# EAGLE board Solo_MultiCharger (EAGLE 6.6.0), part 1 of 2
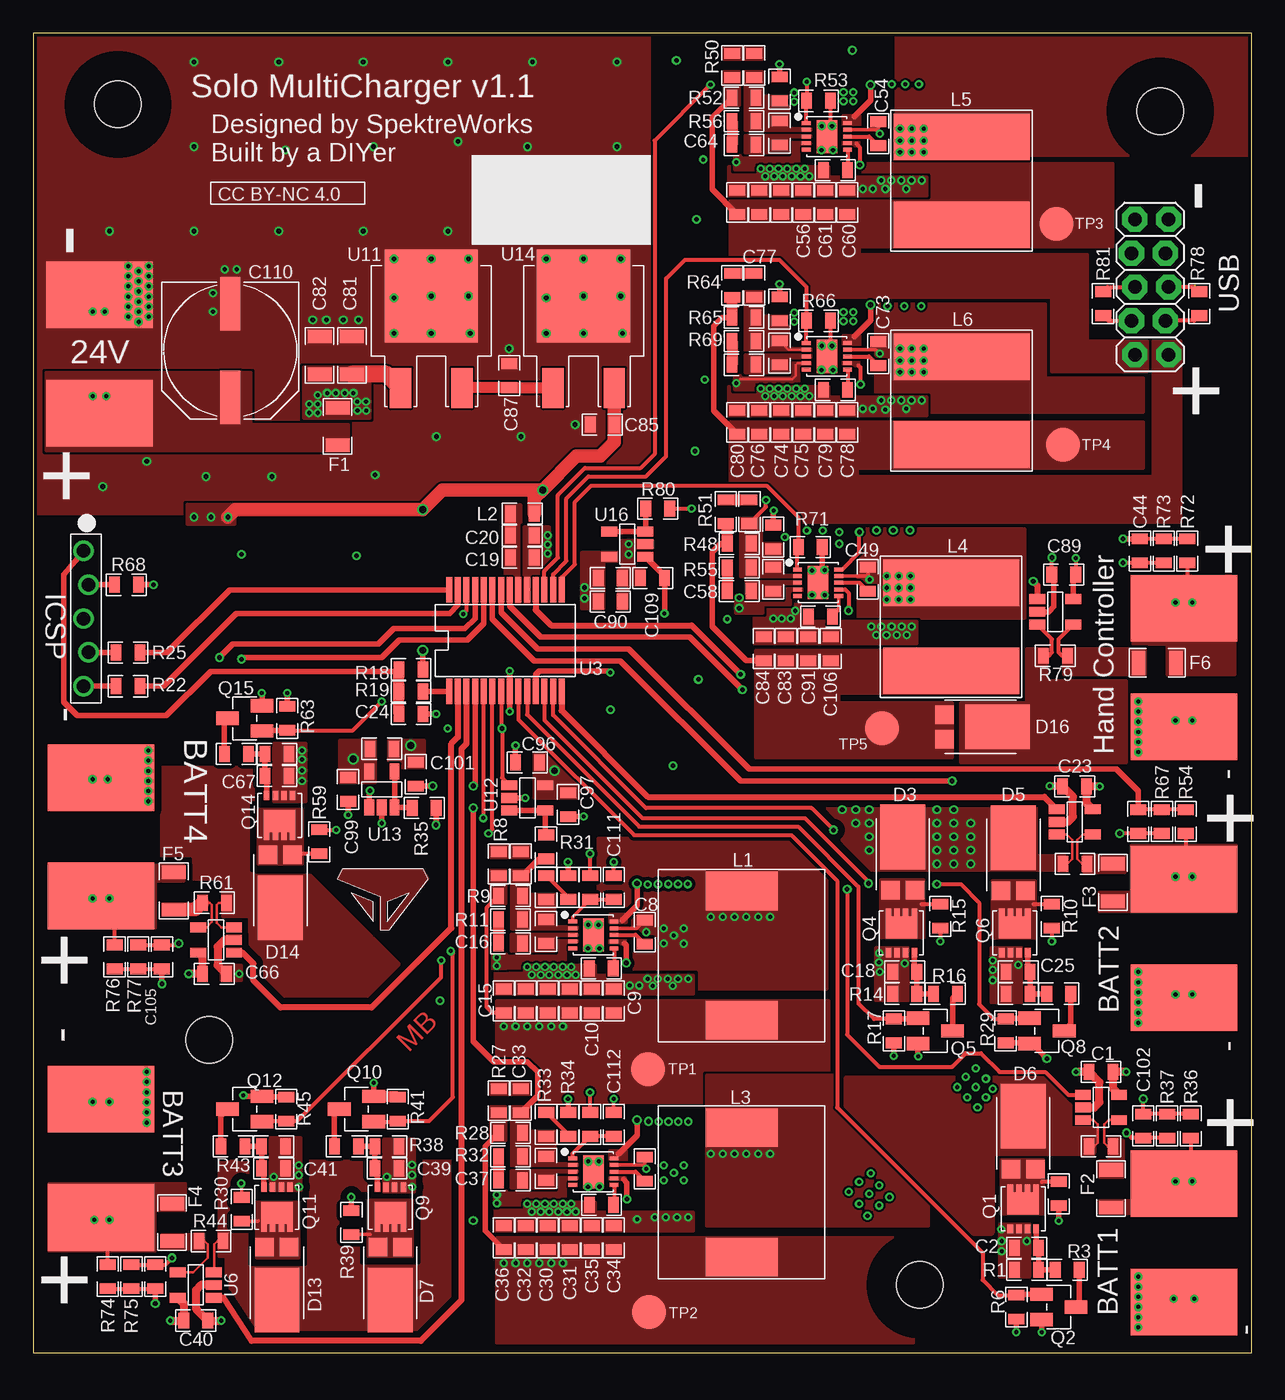
[diagram p0: board, top side]
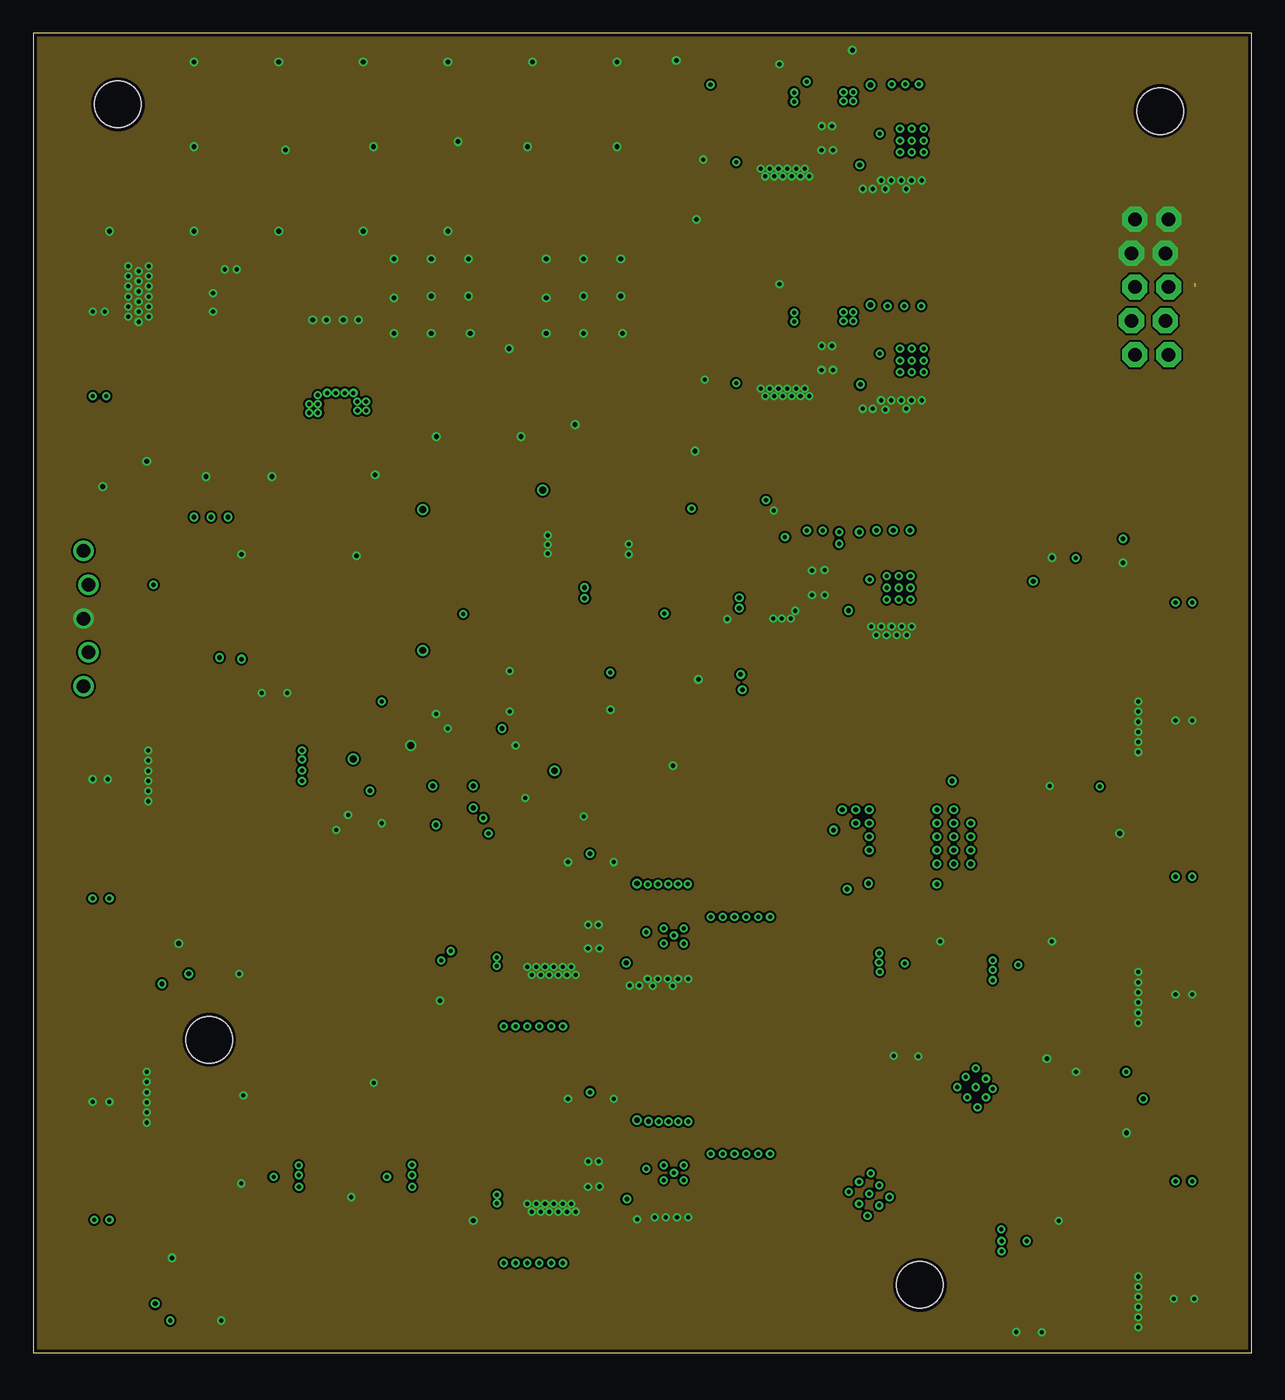
[diagram p1: board, inner layer Route2]
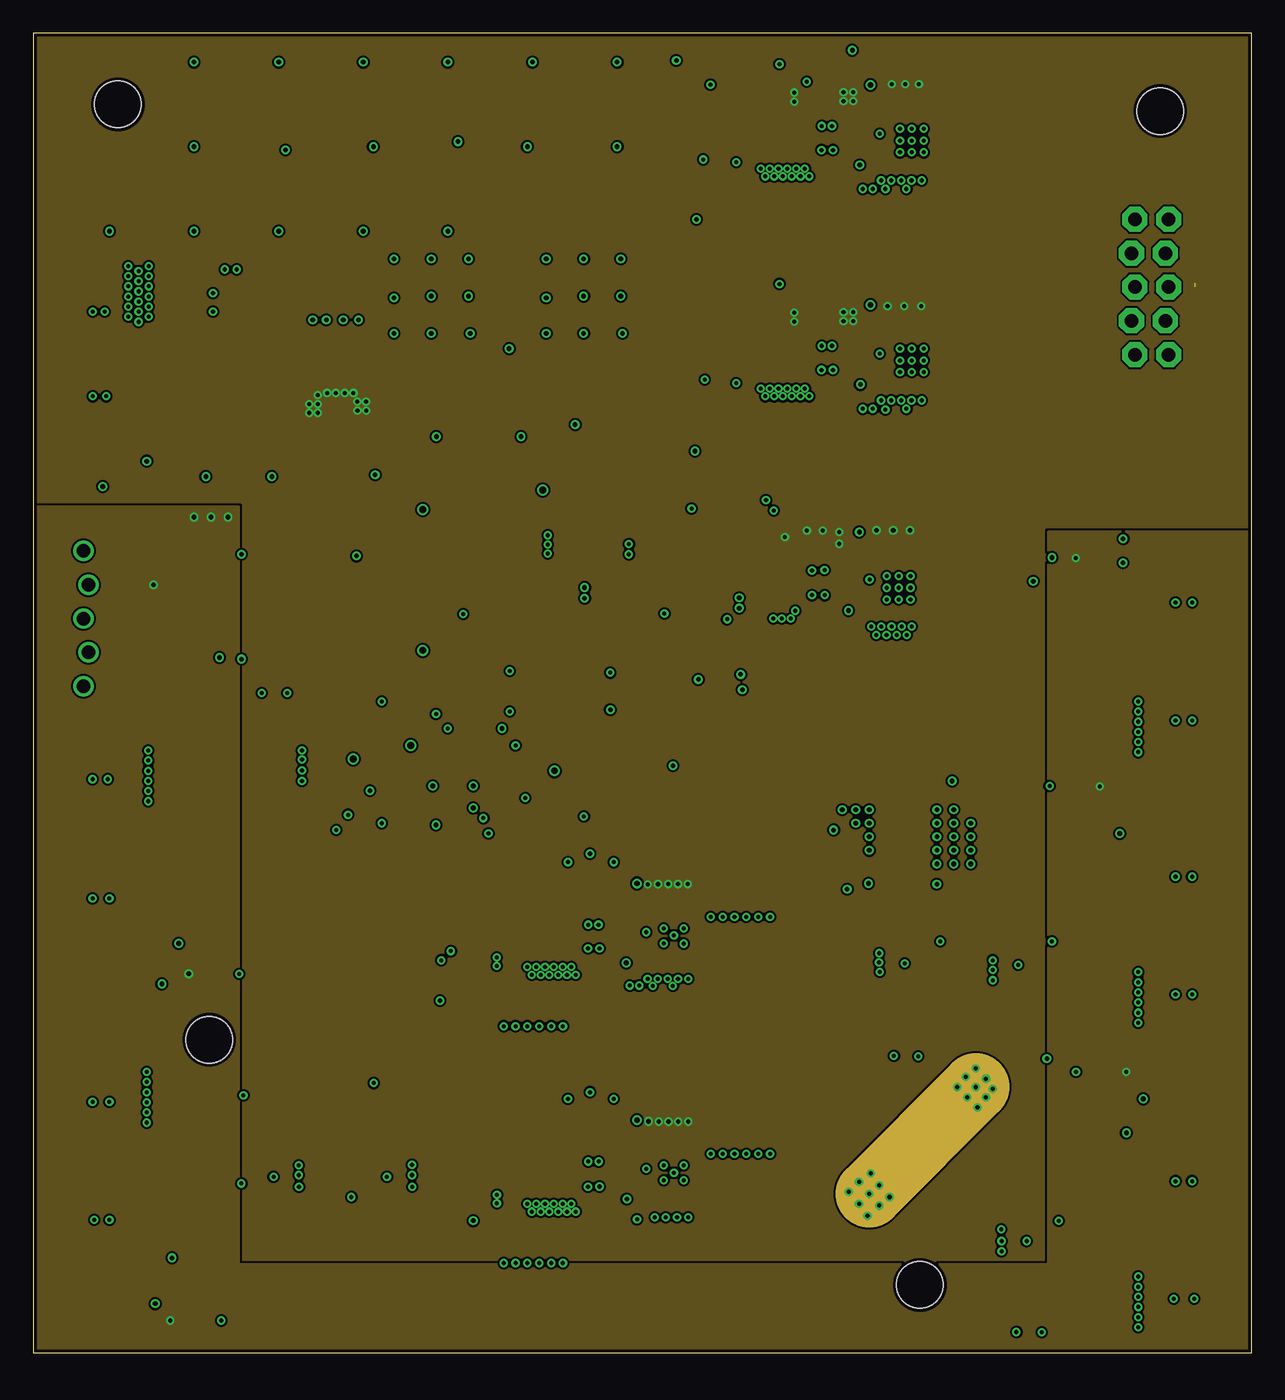
[diagram p2: board, inner layer Route15]
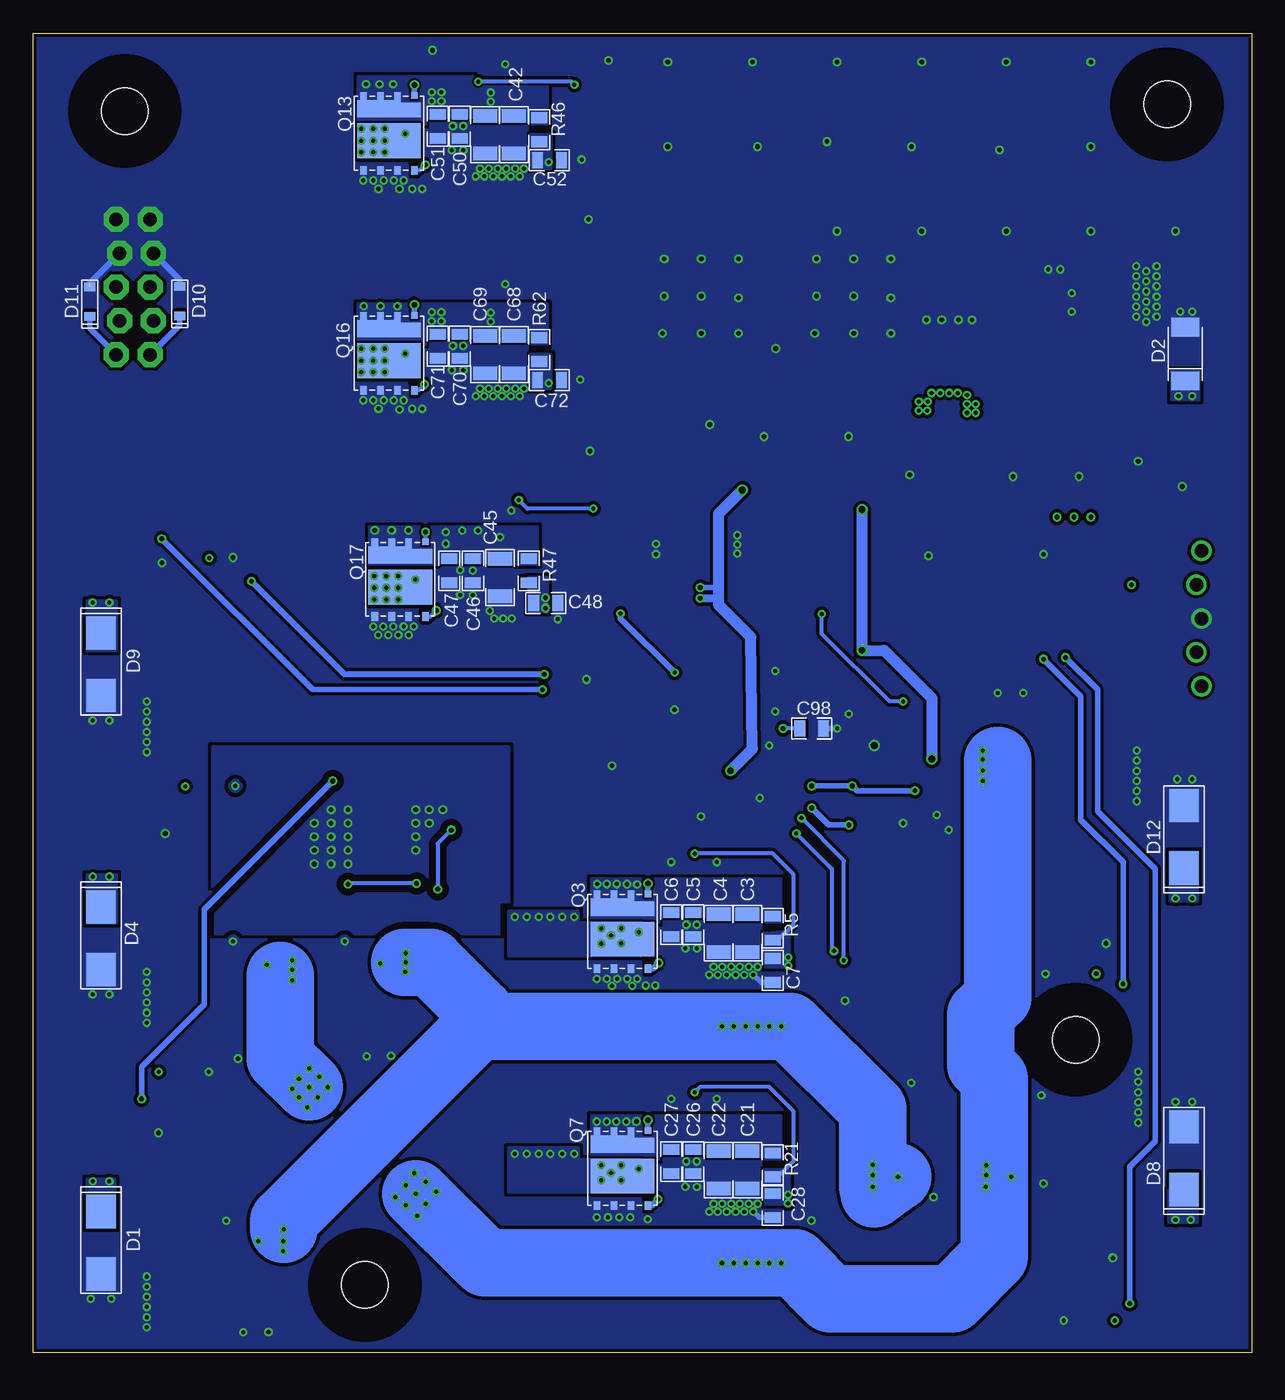
[diagram p3: board, bottom side, seen from below]

Size 91.44 x 99.06 mm. Coordinates in mm from the lower left corner, seen from the top.
Outline: 0,0 91.44,0 91.44,99.06 0,99.06 0,0
Copper layers (1*2*15*16): Top 0.035mm / dielectric 0.23mm / Route2 0.035mm / dielectric 0.93mm / Route15 0.035mm / dielectric 0.23mm / Bottom 0.035mm
Design rules "Macrofab_Standard_4Layer": minimum track width 6mil, minimum drill 12mil, track to track 6mil, track to pad 6mil, pad to pad 6mil, via to via 6mil, smd to smd 0mil, copper to edge 10mil, drill to drill 10mil, minimum pad ring 6mil, minimum via ring 6mil, stop-mask expansion 2mil, vias tented up to drill 25mil, thermal gap 10mil

## Footprints (pad centres in the part's own frame; a part is rotated, then mirrored left to right if it is on the bottom)
0805 = smd 0.8 x 1.2: 1 -0.9,0; 2 0.9,0
1206 = smd 1.016 x 1.803: 1 -1.41,0; 2 1.41,0
NICHICON_10MM = smd 1.5 x 4: + 0,3.5; - 0,-3.5
DO-214AA = smd 2.5 x 2.2: A -2.35,0; C 2.35,0
DO-214AC = smd 1.4 x 2.1: A 2.015,0; C -2.015,0
POWERDI-5 = smd 1.39 x 1.4: A@1 -0.92,-2.855; A@2 0.92,-2.855 | smd 3.36 x 4.86: C 0,1.127
SOD-323 = smd 0.63 x 0.83: A -1.113,0; C 1.113,0
SULLINS_XPXC_5PIN = drill 1.016: 1 5.08,0.191; 2 2.54,-0.191; 3 0,0.191; 4 -2.54,-0.191; 5 -5.08,0.191
CON_100MIL_2X5 = drill 1.016 pad 1.88 octagon: 1 -5.08,-1.143; 2 -5.08,1.397; 3 -2.54,-1.397; 4 -2.54,1.143; 5 0,-1.143; 6 0,1.397; 7 2.54,-1.397; 8 2.54,1.143; 9 5.08,-1.143; 10 5.08,1.397
BOURNS_SRR1280 = smd 2.9 x 5.4: P$1 -4.85,0; P$2 4.85,0
BOURNS_SRN1060 = smd 3.5 x 10.2: 1 -3.3,0; 2 3.3,0
SOLDER_PAD_5X8 = smd 5 x 8: 1 0,0
POWERVDFN-8 = smd 0.42 x 0.7: 1 -0.975,-1.5; 2 -0.325,-1.5; 3 0.325,-1.5; 4 0.975,-1.5 | smd 0.42 x 0.6: 5 0.975,1.55; 6 0.325,1.55; 7 -0.325,1.55; 8 -0.975,1.55 | smd 2.37 x 1.65: EP 0,0.425
SOT-23-3 = smd 1 x 1.7: 1 0.95,1.3; 2 -0.95,1.3; 3 0,-1.3
DFN5X6B_8L_EP2_ALPHA&OMEGA = smd 0.5 x 0.5: 1 -1.905,-2.825 | smd 0.5 x 0.6: 2 -0.635,-2.775; 3 0.635,-2.775; 4 1.905,-2.775 | smd 0.5 x 0.65: 5 1.905,2.8; 6 0.635,2.8; 7 -0.635,2.8; 8 -1.905,2.8 | smd 1.515 x 1.1: EP1@1 -1.643,-1.725 | smd 3.285 x 1.3: EP1@2 0.757,-1.825 | smd 4.8 x 2.6: EP2 0,0.575
TESTPAD = smd 2.54 x 2.54: TP 0,0
SOT-23-5 = smd 0.739 x 1.191: 1 0.95,1.35; 2 0,1.35; 3 -0.95,1.35; 4 -0.95,-1.35; 5 0.95,-1.35
VFDFN-10_EP = smd 0.3 x 0.65: 1 -1,-1.55; 2 -0.5,-1.55; 3 0,-1.55; 4 0.5,-1.55; 5 1,-1.55; 6 1,1.55; 7 0.5,1.55; 8 0,1.55; 9 -0.5,1.55; 10 -1,1.55 | smd 2.48 x 1.55: EP 0,0
SSOP-28 = smd 0.45 x 1.905: 1 -4.225,-3.81; 2 -3.575,-3.81; 3 -2.925,-3.81; 4 -2.275,-3.81; 5 -1.625,-3.81; 6 -0.975,-3.81; 7 -0.325,-3.81; 8 0.325,-3.81; 9 0.975,-3.81; 10 1.625,-3.81; 11 2.275,-3.81; 12 2.925,-3.81; 13 3.575,-3.81; 14 4.225,-3.81; 15 4.225,3.81; 16 3.575,3.81; 17 2.925,3.81; 18 2.275,3.81; 19 1.625,3.81; 20 0.975,3.81; 21 0.325,3.81; 22 -0.325,3.81; 23 -0.975,3.81; 24 -1.625,3.81; 25 -2.275,3.81; 26 -2.925,3.81; 27 -3.575,3.81; 28 -4.225,3.81
TO-252-3 = smd 1.6 x 3: 1 -2.3,-6.9; 3 2.3,-6.9 | smd 7 x 7: 4 0,0
MOUNTING_HOLE_M3 = hole 3.5: 0,0

## Placement (x,y rotation side)
C1  0.1uF  [0805]  80.14,21.08 180 top
C2  1uF 35V  [0805]  74.55,7.87 0 top
C3  10uF 35V 1206  [1206]  37.85,31.5 270 bottom
C4  10uF 35V 1206  [1206]  40.01,31.5 270 bottom
C5  1uF 35V  [0805]  41.91,32.13 270 bottom
C6  0.1uF 35V  [0805]  43.56,32.13 270 bottom
C7  1uF 35V  [0805]  35.94,28.7 270 bottom
C8  0.33uF 50V  [0805]  45.9,31.57 90 top
C9  10uF 35V  [0805]  43.56,26.42 90 top
C10  10uF 35V  [0805]  41.91,26.42 90 top
C11  10uF 35V  [0805]  40.26,26.42 90 top
C12  620pF 25V  [0805]  36.58,36.7 270 top
C13  10uF 35V  [0805]  38.61,26.42 90 top
C14  10uF 35V  [0805]  36.96,26.42 90 top
C15  10uF 35V  [0805]  35.31,26.42 90 top
C16  4700pF  [0805]  35.81,30.73 180 top
C17  56pF  [0805]  38.48,31.62 90 top
C18  1uF 35V  [0805]  65.41,28.6 0 top
C19  10uF  [0805]  36.7,59.69 0 top
C20  0.1uF  [0805]  36.7,61.34 0 top
C21  10uF 35V 1206  [1206]  37.85,13.72 270 bottom
C22  10uF 35V 1206  [1206]  40.01,13.72 270 bottom
C23  0.1uF  [0805]  78.16,42.52 180 top
C24  0.1uF  [0805]  28.35,47.96 0 top
C25  1uF 35V  [0805]  73.91,28.6 0 top
C26  1uF 35V  [0805]  41.91,14.35 270 bottom
C27  0.1uF 35V  [0805]  43.56,14.35 270 bottom
C28  1uF 35V  [0805]  35.94,11.05 270 bottom
C29  0.33uF 50V  [0805]  45.9,13.79 90 top
C30  10uF 35V  [0805]  38.61,8.64 90 top
C31  10uF 35V  [0805]  40.26,8.64 90 top
C32  10uF 35V  [0805]  36.96,8.64 90 top
C33  620pF 25V  [0805]  36.58,18.92 270 top
C34  10uF 35V  [0805]  43.56,8.64 90 top
C35  10uF 35V  [0805]  41.91,8.64 90 top
C36  10uF 35V  [0805]  35.31,8.64 90 top
C37  4700pF  [0805]  35.81,12.95 180 top
C38  56pF  [0805]  38.48,13.84 90 top
C39  1uF 35V  [0805]  26.54,13.84 180 top
C40  0.1uF  [0805]  12.19,2.41 0 top
C41  1uF 35V  [0805]  18.03,13.84 180 top
C42  10uF 35V 1206  [1206]  55.37,91.44 270 bottom
C43  10uF 35V 1206  [1206]  57.53,91.44 270 bottom
C44  0.1uF 35V  [0805]  83.06,60.2 270 top
C45  10uF 35V 1206  [1206]  56.41,58.19 270 bottom
C46  1uF 35V  [0805]  58.45,58.7 270 bottom
C47  0.1uF 35V  [0805]  60.22,58.7 270 bottom
C48  1uF 35V  [0805]  52.98,56.29 0 bottom
C49  0.33uF 50V  [0805]  62.64,58.06 90 top
C50  1uF 35V  [0805]  59.44,92.08 270 bottom
C51  0.1uF 35V  [0805]  61.09,92.08 270 bottom
C52  1uF 35V  [0805]  52.7,89.53 0 bottom
C53  680pF  [0805]  53.75,63.14 270 top
C54  0.33uF 50V  [0805]  63.42,91.52 90 top
C55  10uF 35V  [0805]  56.13,86.36 90 top
C56  10uF 35V  [0805]  57.78,86.36 90 top
C57  10uF 35V  [0805]  54.48,86.36 90 top
C58  4700pF  [0805]  52.98,57.18 180 top
C59  680pF  [0805]  54.1,96.65 270 top
C60  10uF 35V  [0805]  61.09,86.36 90 top
C61  10uF 35V  [0805]  59.44,86.36 90 top
C62  10uF 35V  [0805]  52.83,86.36 90 top
C63  33pF  [0805]  55.52,58.06 90 top
C64  4700pF  [0805]  53.34,90.68 180 top
C65  43pF  [0805]  56.01,91.57 90 top
C66  0.1uF  [0805]  13.59,28.45 0 top
C67  1uF 35V  [0805]  18.29,43.31 180 top
C68  10uF 35V 1206  [1206]  55.37,74.93 270 bottom
C69  10uF 35V 1206  [1206]  57.53,74.93 270 bottom
C70  1uF 35V  [0805]  59.44,75.56 270 bottom
C71  0.1uF 35V  [0805]  61.09,75.56 270 bottom
C72  1uF 35V  [0805]  52.7,73.03 0 bottom
C73  0.33uF 50V  [0805]  63.42,75.01 90 top
C74  10uF 35V  [0805]  56.13,69.85 90 top
C75  10uF 35V  [0805]  57.78,69.85 90 top
C76  10uF 35V  [0805]  54.48,69.85 90 top
C77  680pF  [0805]  54.1,80.14 270 top
C78  10uF 35V  [0805]  61.09,69.85 90 top
C79  10uF 35V  [0805]  59.44,69.85 90 top
C80  10uF 35V  [0805]  52.83,69.85 90 top
C81  10uF 35V 1206  [1206]  23.9,74.88 90 top
C82  10uF 35V 1206  [1206]  21.49,74.88 90 top
C83  10uF 16V  [0805]  56.49,52.86 90 top
C84  10uF 16V  [0805]  54.81,52.86 90 top
C85  10uF  [0805]  42.7,69.67 180 top
C86  4700pF  [0805]  53.34,74.17 180 top
C87  10uF 35V  [0805]  35.71,73.36 90 top
C88  43pF  [0805]  56.01,75.06 90 top
C89  0.1uF  [0805]  77.34,58.42 180 top
C90  10uF  [0805]  43.31,56.39 0 top
C91  10uF 16V  [0805]  58.17,52.86 90 top
C92  4.7uF  [0805]  42.62,28.85 180 top
C93  4.7uF  [0805]  42.65,11.1 180 top
C94  4.7uF  [0805]  60.2,88.77 180 top
C95  4.7uF  [0805]  60.2,72.29 180 top
C96  10uF  [0805]  37.08,44.32 180 top
C97  0.1uF  [0805]  40.13,41.15 270 top
C98  0.1uF  [0805]  33.02,46.86 0 bottom
C99  10uF  [0805]  23.62,42.29 270 top
C100  0.1uF  [0805]  26.16,45.34 0 top
C101  0.1uF  [0805]  28.7,43.43 90 top
C102  0.1uF 35V  [0805]  83.31,17.02 270 top
C103  0.1uF 35V  [0805]  82.93,39.88 270 top
C104  0.1uF 35V  [0805]  9.14,5.71 90 top
C105  0.1uF 35V  [0805]  9.65,29.72 90 top
C106  10uF 16V  [0805]  59.84,52.86 90 top
C107  4.7uF  [0805]  59.08,55.27 180 top
C108  0.1uF  [0805]  43.31,58.17 0 top
C109  0.1uF  [0805]  46.48,58.17 180 top
C110  UCL1V221MCL6GS  [NICHICON_10MM]  14.78,75.23 180 top
C111  4.7uF  [0805]  43.56,34.92 90 top
C112  1uF  [0805]  43.56,17.14 90 top
D1  1SMB17AT3G  [DO-214AA]  86.36,8.26 90 bottom
D2  1SMA24AT3G  [DO-214AC]  4.98,74.98 90 bottom
D3  SBR10E45P5-13  [POWERDI-5]  65.25,37.59 0 top
D4  1SMB17AT3G  [DO-214AA]  86.36,31.11 90 bottom
D5  SBR10E45P5-13  [POWERDI-5]  73.56,37.54 0 top
D6  SBR10E45P5-13  [POWERDI-5]  74.3,16.64 0 top
D7  SBR10E45P5-13  [POWERDI-5]  26.8,5.08 180 top
D8  1SMB17AT3G  [DO-214AA]  5.08,14.61 270 bottom
D9  1SMB8.5AT3G  [DO-214AA]  86.36,51.69 90 bottom
D10  ESDA8V2-1J  [SOD-323]  87.2,78.92 270 bottom
D11  ESDA8V2-1J  [SOD-323]  80.44,78.94 270 bottom
D12  1SMB17AT3G  [DO-214AA]  5.08,38.73 270 bottom
D13  SBR10E45P5-13  [POWERDI-5]  18.29,5.08 180 top
D14  SBR10E45P5-13  [POWERDI-5]  18.54,34.54 180 top
D16  SBR10E45P5-13  [POWERDI-5]  71.25,46.99 270 top
F1  C1F 6  [1206]  22.83,69.55 90 top
F2  C1F 4  [1206]  80.9,12.32 90 top
F3  C1F 4  [1206]  81.03,35.31 90 top
F4  C1F 4  [1206]  10.41,9.78 270 top
F5  C1F 4  [1206]  10.54,34.67 270 top
F6  C1F 3  [1206]  84.35,51.79 180 top
J1  [SULLINS_XPXC_5PIN]  3.96,55.12 90 top
J2  68021-410HLF  [CON_100MIL_2X5]  83.82,80.01 270 top
L1  SRR1280-180M  [BOURNS_SRR1280]  53.16,29.82 270 top
L2  MLZ2012M100WT000  [0805]  36.7,62.99 180 top
L3  SRR1280-180M  [BOURNS_SRR1280]  53.16,12.04 270 top
L4  SRN1060-330M  [BOURNS_SRN1060]  68.88,54.51 270 top
L5  SRN1060-180M  [BOURNS_SRN1060]  69.67,87.99 270 top
L6  SRN1060-180M  [BOURNS_SRN1060]  69.67,71.48 270 top
P1  [SOLDER_PAD_5X8]  86.36,3.81 90 top
P2  [SOLDER_PAD_5X8]  86.36,12.7 90 top
P3  [SOLDER_PAD_5X8]  4.98,70.54 90 top
P4  [SOLDER_PAD_5X8]  4.98,79.43 90 top
P5  [SOLDER_PAD_5X8]  86.36,26.67 90 top
P6  [SOLDER_PAD_5X8]  86.36,35.56 90 top
P7  [SOLDER_PAD_5X8]  5.08,19.05 90 top
P8  [SOLDER_PAD_5X8]  5.08,10.16 90 top
P9  [SOLDER_PAD_5X8]  86.36,55.88 90 top
P10  [SOLDER_PAD_5X8]  86.36,46.99 90 top
P11  [SOLDER_PAD_5X8]  5.08,43.18 90 top
P12  [SOLDER_PAD_5X8]  5.08,34.29 90 top
Q1  DMP3017SFG-7  [POWERVDFN-8]  74.3,10.79 0 top
Q2  2N7002P  [SOT-23-3]  76.96,3.43 90 top
Q3  AON6980  [DFN5X6B_8L_EP2_ALPHA&OMEGA]  47.22,31.62 180 bottom
Q4  DMP3017SFG-7  [POWERVDFN-8]  65.15,31.52 0 top
Q5  2N7002P  [SOT-23-3]  67.69,24.16 90 top
Q6  DMP3017SFG-7  [POWERVDFN-8]  73.66,31.52 0 top
Q7  AON6980  [DFN5X6B_8L_EP2_ALPHA&OMEGA]  47.22,13.84 180 bottom
Q8  2N7002P  [SOT-23-3]  76.07,24.16 90 top
Q9  DMP3017SFG-7  [POWERVDFN-8]  26.8,10.92 180 top
Q10  2N7002P  [SOT-23-3]  24.26,18.29 270 top
Q11  DMP3017SFG-7  [POWERVDFN-8]  18.29,10.92 180 top
Q12  2N7002P  [SOT-23-3]  15.88,18.29 270 top
Q13  AON6980  [DFN5X6B_8L_EP2_ALPHA&OMEGA]  64.74,91.57 180 bottom
Q14  DMP3017SFG-7  [POWERVDFN-8]  18.49,40.34 180 top
Q15  2N7002P  [SOT-23-3]  15.88,47.62 270 top
Q16  AON6980  [DFN5X6B_8L_EP2_ALPHA&OMEGA]  64.74,75.06 180 bottom
Q17  AON6980  [DFN5X6B_8L_EP2_ALPHA&OMEGA]  63.91,58.06 180 bottom
R1  14.7k  [0805]  74.55,6.22 180 top
R2  100k  [0805]  76.96,11.94 90 top
R3  10k  [0805]  77.6,6.22 180 top
R4  10mR  [0805]  80.14,15.49 180 top
R5  2.2  [0805]  35.94,31.88 270 bottom
R6  10k  [0805]  73.79,3.43 90 top
R7  100k  [0805]  41.78,34.92 90 top
R8  2k  [0805]  34.92,36.7 270 top
R9  49.9k 1%  [0805]  35.81,34.29 180 top
R10  100k  [0805]  76.45,32.77 90 top
R11  10.5k  [0805]  35.81,32.51 180 top
R12  1.82k 1%  [0805]  38.48,34.92 270 top
R13  30  [0805]  40.13,34.92 270 top
R14  14.7k  [0805]  65.41,26.95 180 top
R15  100k  [0805]  68.07,32.77 90 top
R16  10k  [0805]  68.45,26.95 180 top
R17  10k  [0805]  64.59,24.16 90 top
R18  10k  [0805]  28.35,51.31 0 top
R19  100  [0805]  28.35,49.63 0 top
R20  14.7k  [0805]  73.91,26.95 180 top
R21  2.2  [0805]  35.94,14.1 270 bottom
R22  49.9  [0805]  7.11,50.04 180 top
R23  100k  [0805]  41.78,17.14 90 top
R24  10k  [0805]  76.96,26.95 180 top
R25  49.9  [0805]  7.11,52.58 180 top
R26  10mR  [0805]  78.18,36.7 180 top
R27  2k  [0805]  34.92,18.92 270 top
R28  49.9k 1%  [0805]  35.81,16.51 180 top
R29  10k  [0805]  72.97,24.16 90 top
R30  100k  [0805]  15.65,10.77 270 top
R31  43k  [0805]  38.48,37.97 90 top
R32  10.5k  [0805]  35.81,14.73 180 top
R33  1.82k 1%  [0805]  38.48,17.14 270 top
R34  30  [0805]  40.13,17.14 270 top
R35  43k  [0805]  29.34,40.89 180 top
R36  15k 1%  [0805]  86.87,17.02 270 top
R37  4.99k 1%  [0805]  85.09,17.02 90 top
R38  14.7k  [0805]  26.54,15.49 0 top
R39  100k  [0805]  23.88,9.78 270 top
R40  10k  [0805]  23.5,15.49 0 top
R41  10k  [0805]  27.36,18.29 270 top
R42  14.7k  [0805]  18.03,15.49 0 top
R43  10k  [0805]  14.99,15.49 0 top
R44  10mR  [0805]  13.34,8.38 0 top
R45  10k  [0805]  18.97,18.29 270 top
R46  2.2  [0805]  53.47,91.82 270 bottom
R47  2.2  [0805]  54.25,58.7 270 bottom
R48  49.9k 1%  [0805]  52.98,60.73 180 top
R49  3.9k 1%  [0805]  55.52,61.24 270 top
R50  1.62k  [0805]  52.45,96.65 270 top
R51  1.43k  [0805]  51.97,63.14 270 top
R52  49.9k 1%  [0805]  53.34,94.23 180 top
R53  10k  [0805]  58.93,93.98 180 top
R54  15k 1%  [0805]  86.49,39.88 270 top
R55  7.5k  [0805]  52.98,58.95 180 top
R56  10.5k  [0805]  53.34,92.46 180 top
R57  6.81k 1%  [0805]  56.01,94.87 270 top
R58  14.7k  [0805]  18.29,44.96 0 top
R59  100k  [0805]  21.46,38.35 270 top
R60  10k  [0805]  15.24,44.96 0 top
R61  10mR  [0805]  13.59,33.78 0 top
R62  2.2  [0805]  53.47,75.31 270 bottom
R63  10k  [0805]  19.05,47.62 270 top
R64  1.62k  [0805]  52.45,80.14 270 top
R65  49.9k 1%  [0805]  53.34,77.72 180 top
R66  10k  [0805]  58.93,77.47 180 top
R67  4.99k 1%  [0805]  84.71,39.88 90 top
R68  300  [0805]  6.99,57.66 0 top
R69  10.5k  [0805]  53.34,75.95 180 top
R70  6.81k 1%  [0805]  56.01,78.36 270 top
R71  10k  [0805]  58.32,60.48 180 top
R72  10k 1%  [0805]  86.61,60.2 270 top
R73  10k 1%  [0805]  84.84,60.2 90 top
R74  15k 1%  [0805]  5.59,5.71 90 top
R75  4.99k 1%  [0805]  7.37,5.71 270 top
R76  15k 1%  [0805]  6.1,29.72 90 top
R77  4.99k 1%  [0805]  7.87,29.72 270 top
R78  49.9  [0805]  87.5,78.77 270 top
R79  10mR  [0805]  76.71,52.32 180 top
R80  100k  [0805]  46.86,63.37 180 top
R81  49.9  [0805]  80.29,78.77 270 top
TP1  TESTPAD  [TESTPAD]  46.13,21.29 0 top
TP2  TESTPAD  [TESTPAD]  46.2,3.05 0 top
TP3  TESTPAD  [TESTPAD]  76.78,84.76 0 top
TP4  TESTPAD  [TESTPAD]  77.27,68.17 0 top
TP5  TESTPAD  [TESTPAD]  63.7,46.89 0 top
U1  CS30CL  [SOT-23-5]  80.14,18.41 90 top
U2  MCP19035-AAABE/MF  [VFDFN-10_EP]  42.04,31.37 270 top
U3  PIC16F1773-I/SS  [SSOP-28]  35.43,53.47 0 top
U4  CS30CL  [SOT-23-5]  78.16,39.85 90 top
U5  MCP19035-AAABE/MF  [VFDFN-10_EP]  42.04,13.59 270 top
U6  CS30CL  [SOT-23-5]  12.19,5.08 270 top
U7  MCP19035-AAABE/MF  [VFDFN-10_EP]  58.9,57.81 270 top
U8  MCP19035-AAABE/MF  [VFDFN-10_EP]  59.56,91.31 270 top
U9  CS30CL  [SOT-23-5]  13.72,30.99 270 top
U10  MCP19035-AAABE/MF  [VFDFN-10_EP]  59.56,74.8 270 top
U11  MC78M12CDTG  [TO-252-3]  29.87,79.32 0 top
U12  MCP6L01UT-E/OT  [SOT-23-5]  37.08,41.66 90 top
U13  MCP6L01UT-E/OT  [SOT-23-5]  26.16,42.29 180 top
U14  MC78M05CDTG  [TO-252-3]  41.3,79.32 0 top
U15  CS30CL  [SOT-23-5]  76.71,55.63 90 top
U16  MCP6L01UT-E/OT  [SOT-23-5]  44.58,60.71 270 top
U$1  [MOUNTING_HOLE_M3]  84.58,93.22 0 top
U$2  [MOUNTING_HOLE_M3]  6.35,93.73 0 top
U$3  [MOUNTING_HOLE_M3]  66.55,5.08 0 top
U$4  [MOUNTING_HOLE_M3]  13.21,23.5 0 top

## Library data of the parts
C1-C112 D1-D14 D16 F1-F6 J1 J2 L1-L6 P1-P12 Q1-Q17 R1-R81 TP1-TP5 U1-U16 U$1-U$4 = dan

## Nets
5V: C1.1 C23.1 C40.1 C66.1 C85.1 C89.1 C90.1 C96.1 C97.1 C99.1 C100.1 C108.1 L2.1 R18.2 R68.2 U1.5 U4.5 U6.5 U9.5 U12.5 U13.5 U14.3 U15.5 U16.5
5V_USB1: C55.1 C56.1 C57.1 C60.1 C61.1 C62.1 D11.C J2.9 L5.2 R50.2 R52.2 TP3.TP
5V_USB2: C74.1 C75.1 C76.1 C78.1 C79.1 C80.1 D10.C J2.10 L6.2 R64.2 R65.2 TP4.TP
!MCLR: C24.1 J1.1 R18.1 R19.1
+8.3V: D9.C F6.1 P9.1 R72.2
+16.8(1)V: C2.1 C9.1 C10.1 C11.1 C13.1 C14.1 C15.1 C18.1 C39.1 L1.P$2 Q1.1 Q1.2 Q1.3 Q4.1 Q4.2 Q4.3 Q9.1 Q9.2 Q9.3 R1.2 R8.2 R9.2 R14.2 R38.2 TP1.TP
+16.8(2)V: C25.1 C30.1 C31.1 C32.1 C34.1 C35.1 C36.1 C41.1 C67.1 L3.P$2 Q6.1 Q6.2 Q6.3 Q11.1 Q11.2 Q11.3 Q14.1 Q14.2 Q14.3 R20.2 R27.2 R28.2 R42.2 R58.2 TP2.TP
+24V: C3.1 C4.1 C5.1 C6.1 C21.1 C22.1 C26.1 C27.1 C42.1 C43.1 C45.1 C46.1 C47.1 C50.1 C51.1 C68.1 C69.1 C70.1 C71.1 C81.1 C82.1 F1.2 Q3.2 Q3.3 Q3.4 Q3.EP1@1 Q3.EP1@2 Q7.2 Q7.3 Q7.4 Q7.EP1@1 Q7.EP1@2 Q13.2 Q13.3 Q13.4 Q13.EP1@1 Q13.EP1@2 Q16.2 Q16.3 Q16.4 Q16.EP1@1 Q16.EP1@2 Q17.2 Q17.3 Q17.4 Q17.EP1@1 Q17.EP1@2 R5.1 R21.1 R46.1 R47.1 R62.1 U11.1
BATT1: D1.C F2.1 P2.1 R36.2
BATT1_CURR_SENSE: U1.1 U3.13
BATT1_SRC1: Q2.1 R6.2 U3.9
BATT1_V_SENSE: C102.1 R36.1 R37.2 U3.23
BATT2: D4.C F3.1 P6.1 R54.2
BATT2_CURR_SENSE: U3.14 U4.1
BATT2_SRC1: Q5.1 R17.2 U3.10
BATT2_SRC2: Q8.1 R29.2 U3.12
BATT2_V_SENSE: C103.1 R54.1 R67.2 U3.22
BATT3: D8.C F4.1 P8.1 R74.2
BATT3_CURR_SENSE: U3.3 U6.1
BATT3_SRC1: Q10.1 R41.2 U3.6
BATT3_SRC2: Q12.1 R45.2 U3.5
BATT3_V_SENSE: C104.1 R74.1 R75.2 U3.25
BATT4: D12.C F5.1 P12.1 R76.2
BATT4_CURR_SENSE: U3.2 U9.1
BATT4_SRC2: Q15.1 R63.2 U3.26
BATT4_V_SENSE: C105.1 R76.1 R77.2 U3.24
CONTROLLER_ADJ_DAC: C109.1 U3.11 U16.1
CONTROLLER_CURR_SENSE: U3.18 U15.1
CONTROLLER_EN: R71.2 U3.15 U7.1
CONTROLLER_V_SENSE: C44.1 R72.1 R73.2 U3.21
GND: C1.2 C3.2 C4.2 C5.2 C6.2 C7.2 C9.2 C10.2 C11.2 C13.2 C14.2 C15.2 C19.2 C20.2 C21.2 C22.2 C23.2 C24.2 C26.2 C27.2 C28.2 C30.2 C31.2 C32.2 C34.2 C35.2 C36.2 C40.2 C42.2 C43.2 C44.2 C45.2 C46.2 C47.2 C48.2 C50.2 C51.2 C52.2 C55.2 C56.2 C57.2 C60.2 C61.2 C62.2 C66.2 C68.2 C69.2 C70.2 C71.2 C72.2 C74.2 C75.2 C76.2 C78.2 C79.2 C80.2 C81.2 C82.2 C83.2 C84.2 C85.2 C87.2 C89.2 C90.2 C91.2 C92.2 C93.2 C94.2 C95.2 C96.2 C97.2 C98.2 C99.2 C100.2 C101.2 C102.2 C103.2 C104.2 C105.2 C106.2 C107.2 C108.2 C109.2 C110.- C111.2 C112.2 D1.A D2.A D4.A D8.A D9.A D10.A D11.A D12.A J1.3 J2.1 J2.2 J2.3 J2.4 P1.1 P4.1 P5.1 P7.1 P10.1 P11.1 Q2.2 Q3.5 Q3.6 Q3.7 Q5.2 Q7.5 Q7.6 Q7.7 Q8.2 Q10.2 Q12.2 Q13.5 Q13.6 Q13.7 Q15.2 Q16.5 Q16.6 Q16.7 Q17.5 Q17.6 Q17.7 R2.1 R6.1 R10.1 R13.1 R15.1 R17.1 R29.1 R30.1 R34.1 R37.1 R39.1 R41.1 R45.1 R49.1 R53.1 R57.1 R59.1 R63.1 R66.1 R67.1 R70.1 R71.1 R73.1 R75.1 R77.1 U1.2 U2.EP U3.8 U3.19 U4.2 U5.EP U6.2 U7.EP U8.EP U9.2 U10.EP U11.4 U12.2 U13.2 U14.4 U15.2 U16.2
N$1: C7.1 R5.2 R7.2 U2.4
N$2: C111.1 R7.1 U2.1
N$3: C52.1 R46.2 U8.4
N$4: C92.1 U2.6
N$5: D5.A@1 D5.A@2 Q6.5 Q6.6 Q6.7 Q6.8 Q6.EP R10.2
N$6: C8.1 U2.8
N$7: C8.2 L1.P$1 Q3.EP2 U2.9
N$8: Q3.1 U2.10
N$9: Q3.8 U2.7
N$10: J1.2 R68.1
N$11: R31.2 U12.3 U12.4
N$12: C87.1 U11.3 U14.1
N$13: C54.1 U8.8
N$14: C54.2 L5.1 Q13.EP2 U8.9
N$15: Q13.8 U8.7
N$16: Q13.1 U8.10
N$17: C12.2 C17.2 R9.1 R11.1 R12.2 R31.1 U2.2
N$18: R12.1 R13.2
N$19: C12.1 R8.1
N$20: C59.2 C65.2 R52.1 R56.1 R57.2 U8.2
N$21: C72.1 R62.2 U10.4
N$22: C59.1 R50.1
N$23: C64.1 C65.1 U8.3
N$24: C64.2 R56.2
N$25: C48.1 R47.2 U7.4
N$26: D3.A@1 D3.A@2 Q4.5 Q4.6 Q4.7 Q4.8 Q4.EP R15.2
N$27: F3.2 R26.1 U4.4
N$28: C73.1 U10.8
N$29: J2.8 R78.2
N$30: C73.2 L6.1 Q16.EP2 U10.9
N$31: Q16.8 U10.7
N$32: C49.1 U7.8
N$33: C49.2 L4.1 Q17.EP2 U7.9
N$34: Q17.8 U7.7
N$35: Q17.1 U7.10
N$36: J2.7 R81.2
N$37: C53.1 R51.1
N$38: C58.1 C63.1 U7.3
N$39: C58.2 R55.2
N$40: C2.2 Q1.4 R1.1 R3.2
N$41: Q2.3 R3.1
N$42: C16.1 C17.1 U2.3
N$43: C18.2 Q4.4 R14.1 R16.2
N$44: C16.2 R11.2
N$45: C28.1 R21.2 R23.2 U5.4
N$46: C112.1 R23.1 U5.1
N$47: C95.1 U10.6
N$48: C107.1 U7.6
N$49: J2.6 R78.1
N$50: C29.2 L3.P$1 Q7.EP2 U5.9
N$51: Q7.8 U5.7
N$52: Q7.1 U5.10
N$53: C33.2 C38.2 R28.1 R32.1 R33.2 R35.1 U5.2
N$54: R33.1 R34.2
N$55: C33.1 R27.1
N$56: C37.1 C38.1 U5.3
N$57: C37.2 R32.2
N$58: Q16.1 U10.10
N$59: C77.2 C88.2 R65.1 R69.1 R70.2 U10.2
N$60: Q5.3 R16.1
N$61: C25.2 Q6.4 R20.1 R24.2
N$62: Q8.3 R24.1
N$63: C39.2 Q9.4 R38.1 R40.2
N$64: Q10.3 R40.1
N$65: C41.2 Q11.4 R42.1 R43.2
N$66: Q12.3 R43.1
N$67: C67.2 Q14.4 R58.1 R60.2
N$68: Q15.3 R60.1
N$69: C77.1 R64.1
N$70: C86.1 C88.1 U10.3
N$71: C86.2 R69.2
N$75: C83.1 C84.1 C91.1 C106.1 D16.A@1 D16.A@2 L4.2 R48.2 R51.2 TP5.TP
N$76: R22.1 U3.27
N$77: C19.1 C20.1 L2.2 U3.20
N$78: R19.2 U3.1
N$79: R25.1 U3.28
N$80: D6.C R4.2 U1.3
N$81: D7.C D13.C R44.2 U6.3
N$82: D3.C D5.C R26.2 U4.3
N$83: D14.C R61.2 U9.3
N$85: D16.C R79.2 U15.3
N$86: C29.1 U5.8
N$87: C93.1 U5.6
N$88: C94.1 U8.6
N$89: R35.2 U13.3 U13.4
N$90: F6.2 R79.1 U15.4
N$91: D6.A@1 D6.A@2 Q1.5 Q1.6 Q1.7 Q1.8 Q1.EP R2.2
N$92: D7.A@1 D7.A@2 Q9.5 Q9.6 Q9.7 Q9.8 Q9.EP R39.2
N$93: D13.A@1 D13.A@2 Q11.5 Q11.6 Q11.7 Q11.8 Q11.EP R30.2
N$94: D14.A@1 D14.A@2 Q14.5 Q14.6 Q14.7 Q14.8 Q14.EP R59.2
N$95: C53.2 C63.2 R48.1 R49.2 R55.1 R80.1 U7.2
N$96: F4.2 R44.1 U6.4
N$97: F5.2 R61.1 U9.4
N$98: F2.2 R4.1 U1.4
N$99: R80.2 U16.3 U16.4
N$100: J2.5 R81.1
PGC: J1.5 R22.2
PGD: J1.4 R25.2
PWR_IN: C110.+ D2.C F1.1 P3.1
USB1_EN: R53.2 U3.17 U8.1
USB2_EN: R66.2 U3.16 U10.1
V1_ADJ_DAC: C98.1 U3.7 U12.1
V2_ADJ_DAC: C101.1 U3.4 U13.1